# EAGLE board Qwiic PL-N823 IR Breakout-Panel (EAGLE 9.5.1)
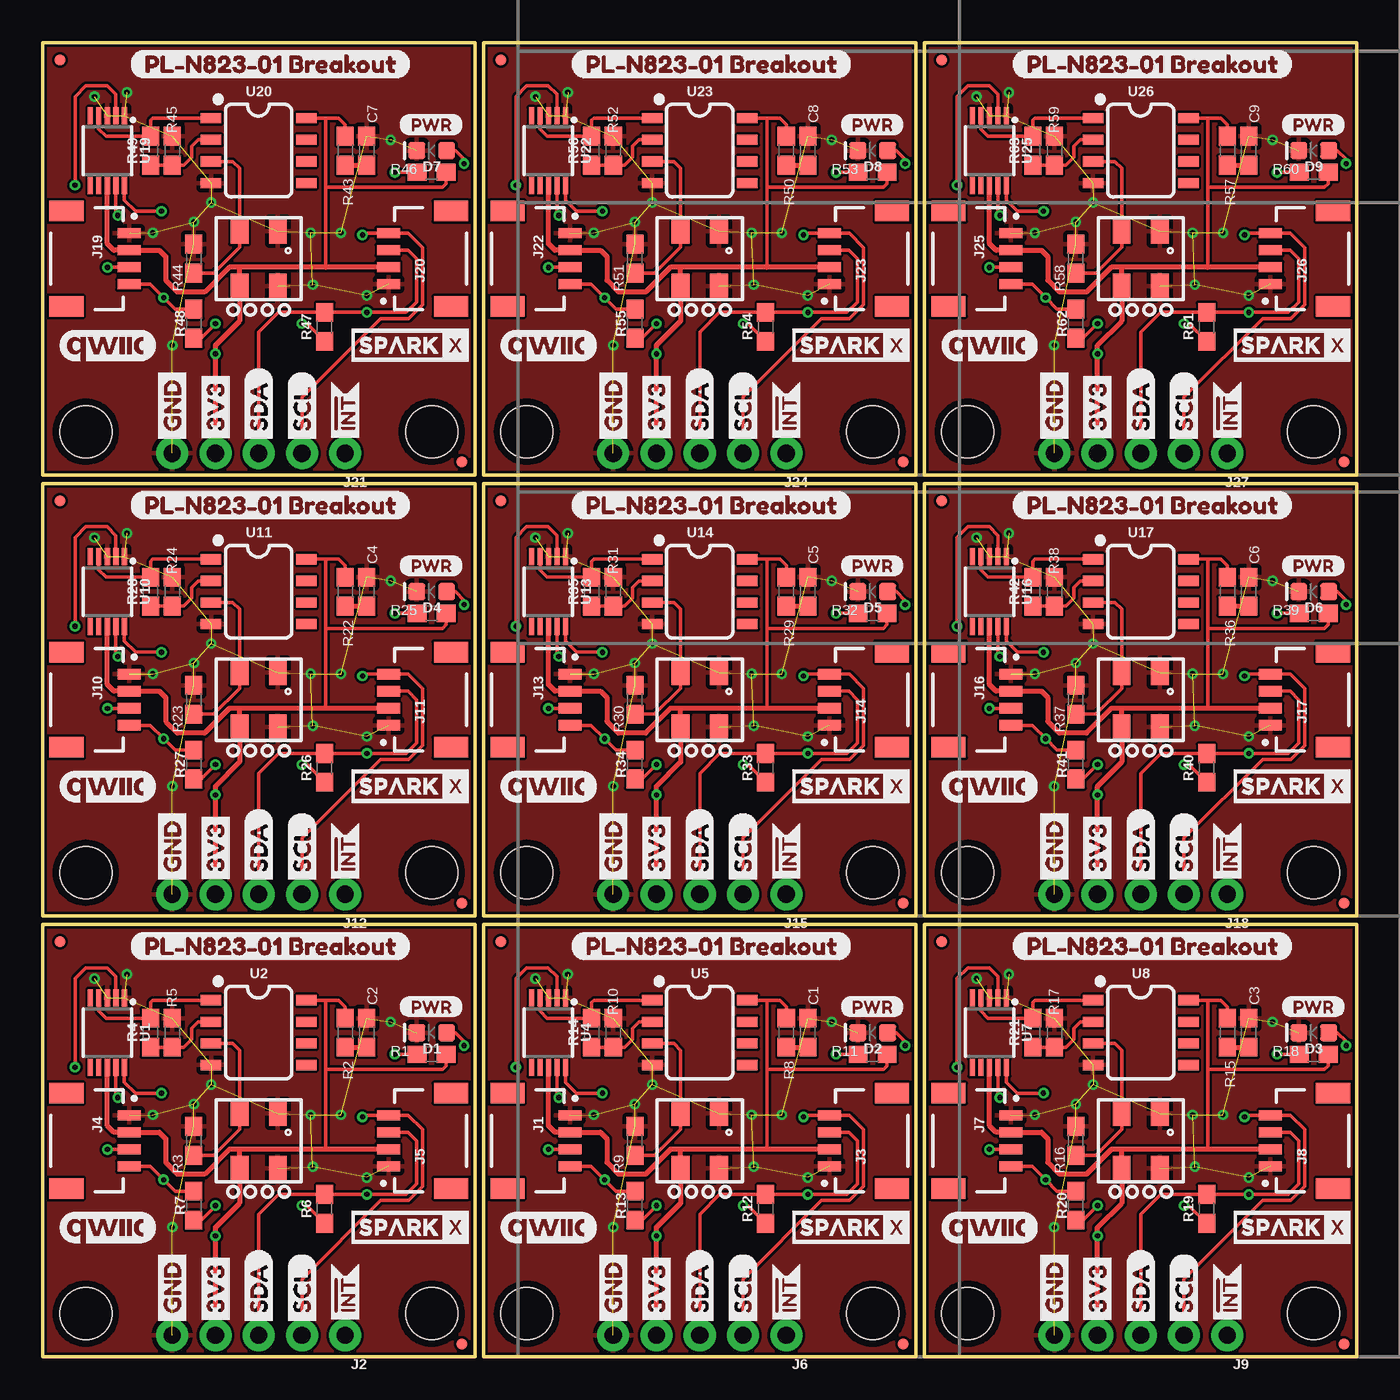
[diagram p0: board, top side]
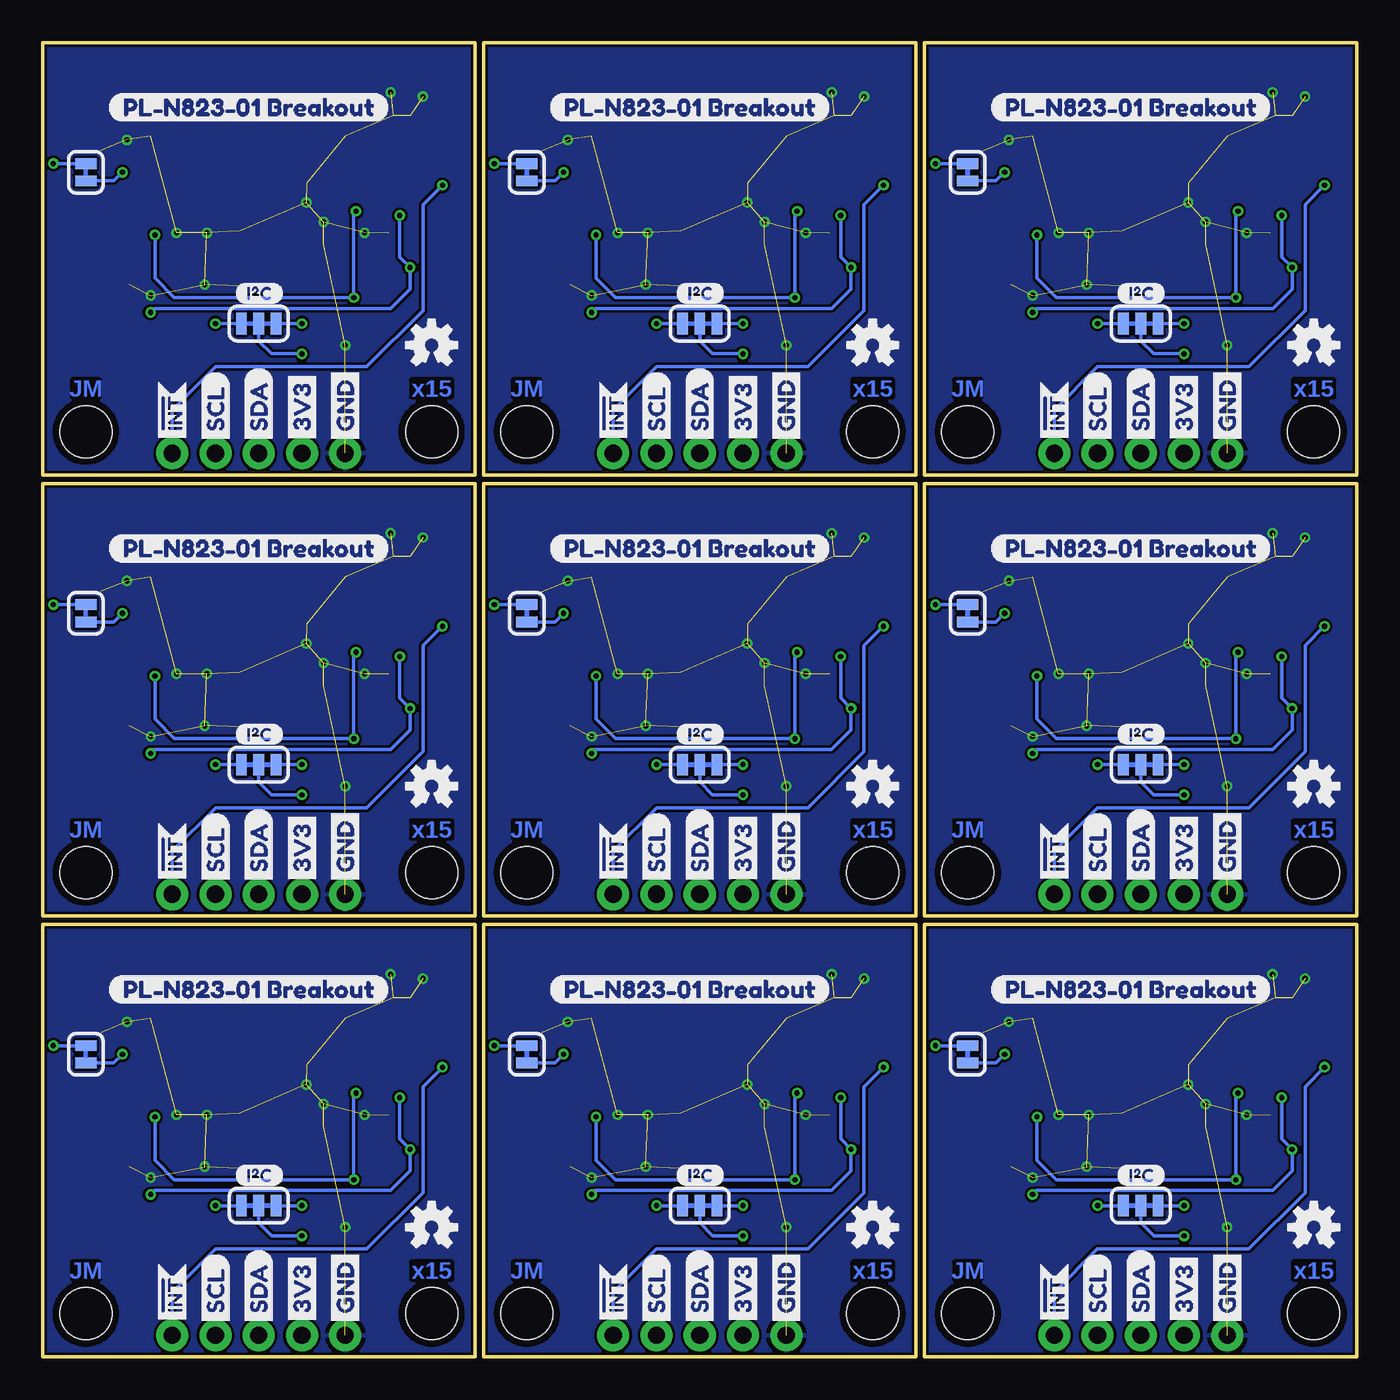
[diagram p1: board, bottom side, seen from below]

Size 77.22 x 77.22 mm. Coordinates in mm from the lower left corner, seen from the top.
Outline: 0,25.4 25.4,25.4 25.4,0 0,0 0,25.4
Outline: 25.91,25.4 51.31,25.4 51.31,0 25.91,0 25.91,25.4
Outline: 51.82,25.4 77.22,25.4 77.22,0 51.82,0 51.82,25.4
Outline: 0,51.31 25.4,51.31 25.4,25.91 0,25.91 0,51.31
Outline: 25.91,51.31 51.31,51.31 51.31,25.91 25.91,25.91 25.91,51.31
Outline: 51.82,51.31 77.22,51.31 77.22,25.91 51.82,25.91 51.82,51.31
Outline: 0,77.22 25.4,77.22 25.4,51.82 0,51.82 0,77.22
Outline: 25.91,77.22 51.31,77.22 51.31,51.82 25.91,51.82 25.91,77.22
Outline: 51.82,77.22 77.22,77.22 77.22,51.82 51.82,51.82 51.82,77.22
Copper layers (1*16): Top 0.035mm / dielectric 1.5mm / Bottom 0.035mm
Design rules "SparkFun-2-layer-PCBWay-LIMIT": minimum track width 6mil, minimum drill 0.3mm, track to track 6mil, track to pad 6mil, pad to pad 6mil, via to via 6mil, smd to smd 6mil, copper to edge 6mil, drill to drill 6mil, minimum pad ring 6mil, minimum via ring 6mil, stop-mask expansion 4mil, vias tented up to drill 25mil, thermal gap 10mil

## Footprints (pad centres in the part's own frame; a part is rotated, then mirrored left to right if it is on the bottom)
0603 = smd 1.1 x 1: 1 -0.85,0; 2 0.85,0
LED-0603 = smd 1 x 1: A -0.877,0; C 0.877,0
FIDUCIAL-MICRO = smd 0.635 x 0.635: 1 0,0
STAND-OFF-TIGHT = hole 3.048: 0,0
JST04_1MM_RA = smd 0.6 x 1.35: 1 -1.5,0; 2 -0.5,0; 3 0.5,0; 4 1.5,0 | smd 1.2 x 2: NC1 2.8,-3.675; NC2 -2.8,-3.675
1X05_NO_SILK = drill 1.016 pad 1.88: 1 0,0; 2 2.54,0; 3 5.08,0; 4 7.62,0; 5 10.16,0
SMT-JUMPER_3_2-NC_TRACE_SILK = smd 0.635 x 1.27: 1 -1.016,0; 2 0,0; 3 1.016,0
SMT-JUMPER_2_NC_TRACE_SILK = smd 0.635 x 1.27: 1 -0.508,0; 2 0.508,0
MSOP10 = smd 0.3 x 1: 1 -1,-2.05; 2 -0.5,-2.05; 3 0,-2.05; 4 0.5,-2.05; 5 1,-2.05; 6 1,2.05; 7 0.5,2.05; 8 0,2.05; 9 -0.5,2.05; 10 -1,2.05
SO08 = smd 0.6 x 1.2: 1 -1.905,-2.8; 2 -0.635,-2.8; 3 0.635,-2.8; 4 1.905,-2.8; 5 1.905,2.8; 6 0.635,2.8; 7 -0.635,2.8; 8 -1.905,2.8
PL-N823-01 = smd 1.05 x 1.475: DRAIN -1.125,-1.613; GND@1 1.125,1.613; GND@2 1.125,-1.613; SOURCE -1.125,1.613

## Placement (x,y rotation side)
C1  0.1uF  [0603]  44.96,19.05 90 top
C2  0.1uF  [0603]  19.05,19.05 90 top
C3  0.1uF  [0603]  70.87,19.05 90 top
C4  0.1uF  [0603]  19.05,44.96 90 top
C5  0.1uF  [0603]  44.96,44.96 90 top
C6  0.1uF  [0603]  70.87,44.96 90 top
C7  0.1uF  [0603]  19.05,70.87 90 top
C8  0.1uF  [0603]  44.96,70.87 90 top
C9  0.1uF  [0603]  70.87,70.87 90 top
D1  BLUE  [LED-0603]  22.86,19.05 180 top
D2  BLUE  [LED-0603]  48.77,19.05 180 top
D3  BLUE  [LED-0603]  74.68,19.05 180 top
D4  BLUE  [LED-0603]  22.86,44.96 180 top
D5  BLUE  [LED-0603]  48.77,44.96 180 top
D6  BLUE  [LED-0603]  74.68,44.96 180 top
D7  BLUE  [LED-0603]  22.86,70.87 180 top
D8  BLUE  [LED-0603]  48.77,70.87 180 top
D9  BLUE  [LED-0603]  74.68,70.87 180 top
FD1  FIDUCIALUFIDUCIAL  [FIDUCIAL-MICRO]  1.02,24.38 0 top
FD2  FIDUCIALUFIDUCIAL  [FIDUCIAL-MICRO]  24.64,0.76 0 top
FD3  FIDUCIALUFIDUCIAL  [FIDUCIAL-MICRO]  26.92,24.38 0 top
FD4  FIDUCIALUFIDUCIAL  [FIDUCIAL-MICRO]  50.55,0.76 0 top
FD5  FIDUCIALUFIDUCIAL  [FIDUCIAL-MICRO]  52.83,24.38 0 top
FD6  FIDUCIALUFIDUCIAL  [FIDUCIAL-MICRO]  76.45,0.76 0 top
FD7  FIDUCIALUFIDUCIAL  [FIDUCIAL-MICRO]  1.02,50.29 0 top
FD8  FIDUCIALUFIDUCIAL  [FIDUCIAL-MICRO]  24.64,26.67 0 top
FD9  FIDUCIALUFIDUCIAL  [FIDUCIAL-MICRO]  26.92,50.29 0 top
FD10  FIDUCIALUFIDUCIAL  [FIDUCIAL-MICRO]  50.55,26.67 0 top
FD11  FIDUCIALUFIDUCIAL  [FIDUCIAL-MICRO]  52.83,50.29 0 top
FD12  FIDUCIALUFIDUCIAL  [FIDUCIAL-MICRO]  76.45,26.67 0 top
FD13  FIDUCIALUFIDUCIAL  [FIDUCIAL-MICRO]  1.02,76.2 0 top
FD14  FIDUCIALUFIDUCIAL  [FIDUCIAL-MICRO]  24.64,52.58 0 top
FD15  FIDUCIALUFIDUCIAL  [FIDUCIAL-MICRO]  26.92,76.2 0 top
FD16  FIDUCIALUFIDUCIAL  [FIDUCIAL-MICRO]  50.55,52.58 0 top
FD17  FIDUCIALUFIDUCIAL  [FIDUCIAL-MICRO]  52.83,76.2 0 top
FD18  FIDUCIALUFIDUCIAL  [FIDUCIAL-MICRO]  76.45,52.58 0 top
FRAME1  FRAME-LETTERNO_PACKAGE  [DUMMY]  0,0 0 top
FRAME2  FRAME-LETTERNO_PACKAGE  [DUMMY]  25.91,0 0 top
FRAME3  FRAME-LETTERNO_PACKAGE  [DUMMY]  51.82,0 0 top
FRAME4  FRAME-LETTERNO_PACKAGE  [DUMMY]  0,25.91 0 top
FRAME5  FRAME-LETTERNO_PACKAGE  [DUMMY]  25.91,25.91 0 top
FRAME6  FRAME-LETTERNO_PACKAGE  [DUMMY]  51.82,25.91 0 top
FRAME7  FRAME-LETTERNO_PACKAGE  [DUMMY]  0,51.82 0 top
FRAME8  FRAME-LETTERNO_PACKAGE  [DUMMY]  25.91,51.82 0 top
FRAME9  FRAME-LETTERNO_PACKAGE  [DUMMY]  51.82,51.82 0 top
H1  STAND-OFFTIGHT  [STAND-OFF-TIGHT]  2.54,2.54 0 top
H2  STAND-OFFTIGHT  [STAND-OFF-TIGHT]  22.86,2.54 0 top
H3  STAND-OFFTIGHT  [STAND-OFF-TIGHT]  28.45,2.54 0 top
H4  STAND-OFFTIGHT  [STAND-OFF-TIGHT]  48.77,2.54 0 top
H5  STAND-OFFTIGHT  [STAND-OFF-TIGHT]  54.36,2.54 0 top
H6  STAND-OFFTIGHT  [STAND-OFF-TIGHT]  74.68,2.54 0 top
H7  STAND-OFFTIGHT  [STAND-OFF-TIGHT]  2.54,28.45 0 top
H8  STAND-OFFTIGHT  [STAND-OFF-TIGHT]  22.86,28.45 0 top
H9  STAND-OFFTIGHT  [STAND-OFF-TIGHT]  28.45,28.45 0 top
H10  STAND-OFFTIGHT  [STAND-OFF-TIGHT]  48.77,28.45 0 top
H11  STAND-OFFTIGHT  [STAND-OFF-TIGHT]  54.36,28.45 0 top
H12  STAND-OFFTIGHT  [STAND-OFF-TIGHT]  74.68,28.45 0 top
H13  STAND-OFFTIGHT  [STAND-OFF-TIGHT]  2.54,54.36 0 top
H14  STAND-OFFTIGHT  [STAND-OFF-TIGHT]  22.86,54.36 0 top
H15  STAND-OFFTIGHT  [STAND-OFF-TIGHT]  28.45,54.36 0 top
H16  STAND-OFFTIGHT  [STAND-OFF-TIGHT]  48.77,54.36 0 top
H17  STAND-OFFTIGHT  [STAND-OFF-TIGHT]  54.36,54.36 0 top
H18  STAND-OFFTIGHT  [STAND-OFF-TIGHT]  74.68,54.36 0 top
J1  [JST04_1MM_RA]  30.99,12.7 270 top
J2  [1X05_NO_SILK]  17.78,1.27 180 top
J3  [JST04_1MM_RA]  46.23,12.7 90 top
J4  [JST04_1MM_RA]  5.08,12.7 270 top
J5  [JST04_1MM_RA]  20.32,12.7 90 top
J6  [1X05_NO_SILK]  43.69,1.27 180 top
J7  [JST04_1MM_RA]  56.9,12.7 270 top
J8  [JST04_1MM_RA]  72.14,12.7 90 top
J9  [1X05_NO_SILK]  69.6,1.27 180 top
J10  [JST04_1MM_RA]  5.08,38.61 270 top
J11  [JST04_1MM_RA]  20.32,38.61 90 top
J12  [1X05_NO_SILK]  17.78,27.18 180 top
J13  [JST04_1MM_RA]  30.99,38.61 270 top
J14  [JST04_1MM_RA]  46.23,38.61 90 top
J15  [1X05_NO_SILK]  43.69,27.18 180 top
J16  [JST04_1MM_RA]  56.9,38.61 270 top
J17  [JST04_1MM_RA]  72.14,38.61 90 top
J18  [1X05_NO_SILK]  69.6,27.18 180 top
J19  [JST04_1MM_RA]  5.08,64.52 270 top
J20  [JST04_1MM_RA]  20.32,64.52 90 top
J21  [1X05_NO_SILK]  17.78,53.09 180 top
J22  [JST04_1MM_RA]  30.99,64.52 270 top
J23  [JST04_1MM_RA]  46.23,64.52 90 top
J24  [1X05_NO_SILK]  43.69,53.09 180 top
J25  [JST04_1MM_RA]  56.9,64.52 270 top
J26  [JST04_1MM_RA]  72.14,64.52 90 top
J27  [1X05_NO_SILK]  69.6,53.09 180 top
JP1  JUMPER-SMT_3_2-NC_TRACE_SILK  [SMT-JUMPER_3_2-NC_TRACE_SILK]  12.7,8.89 0 bottom
JP2  JUMPER-SMT_2_NC_TRACE_SILK  [SMT-JUMPER_2_NC_TRACE_SILK]  22.86,17.78 90 bottom
JP3  JUMPER-SMT_3_2-NC_TRACE_SILK  [SMT-JUMPER_3_2-NC_TRACE_SILK]  38.61,8.89 0 bottom
JP4  JUMPER-SMT_2_NC_TRACE_SILK  [SMT-JUMPER_2_NC_TRACE_SILK]  48.77,17.78 90 bottom
JP5  JUMPER-SMT_3_2-NC_TRACE_SILK  [SMT-JUMPER_3_2-NC_TRACE_SILK]  64.52,8.89 0 bottom
JP6  JUMPER-SMT_2_NC_TRACE_SILK  [SMT-JUMPER_2_NC_TRACE_SILK]  74.68,17.78 90 bottom
JP7  JUMPER-SMT_3_2-NC_TRACE_SILK  [SMT-JUMPER_3_2-NC_TRACE_SILK]  12.7,34.8 0 bottom
JP8  JUMPER-SMT_2_NC_TRACE_SILK  [SMT-JUMPER_2_NC_TRACE_SILK]  22.86,43.69 90 bottom
JP9  JUMPER-SMT_3_2-NC_TRACE_SILK  [SMT-JUMPER_3_2-NC_TRACE_SILK]  38.61,34.8 0 bottom
JP10  JUMPER-SMT_2_NC_TRACE_SILK  [SMT-JUMPER_2_NC_TRACE_SILK]  48.77,43.69 90 bottom
JP11  JUMPER-SMT_3_2-NC_TRACE_SILK  [SMT-JUMPER_3_2-NC_TRACE_SILK]  64.52,34.8 0 bottom
JP12  JUMPER-SMT_2_NC_TRACE_SILK  [SMT-JUMPER_2_NC_TRACE_SILK]  74.68,43.69 90 bottom
JP13  JUMPER-SMT_3_2-NC_TRACE_SILK  [SMT-JUMPER_3_2-NC_TRACE_SILK]  12.7,60.71 0 bottom
JP14  JUMPER-SMT_2_NC_TRACE_SILK  [SMT-JUMPER_2_NC_TRACE_SILK]  22.86,69.6 90 bottom
JP15  JUMPER-SMT_3_2-NC_TRACE_SILK  [SMT-JUMPER_3_2-NC_TRACE_SILK]  38.61,60.71 0 bottom
JP16  JUMPER-SMT_2_NC_TRACE_SILK  [SMT-JUMPER_2_NC_TRACE_SILK]  48.77,69.6 90 bottom
JP17  JUMPER-SMT_3_2-NC_TRACE_SILK  [SMT-JUMPER_3_2-NC_TRACE_SILK]  64.52,60.71 0 bottom
JP18  JUMPER-SMT_2_NC_TRACE_SILK  [SMT-JUMPER_2_NC_TRACE_SILK]  74.68,69.6 90 bottom
R1  27  [0603]  22.86,17.78 0 top
R2  10k  [0603]  17.78,19.05 270 top
R3  47k  [0603]  8.89,12.7 90 top
R4  1.20k  [0603]  6.35,19.05 90 top
R5  1k  [0603]  7.62,19.05 270 top
R6  2.2k  [0603]  16.57,8.7 90 top
R7  2.2k  [0603]  8.89,8.89 90 top
R8  10k  [0603]  43.69,19.05 270 top
R9  47k  [0603]  34.8,12.7 90 top
R10  1k  [0603]  33.53,19.05 270 top
R11  27  [0603]  48.77,17.78 0 top
R12  2.2k  [0603]  42.48,8.7 90 top
R13  2.2k  [0603]  34.8,8.89 90 top
R14  1.20k  [0603]  32.26,19.05 90 top
R15  10k  [0603]  69.6,19.05 270 top
R16  47k  [0603]  60.71,12.7 90 top
R17  1k  [0603]  59.44,19.05 270 top
R18  27  [0603]  74.68,17.78 0 top
R19  2.2k  [0603]  68.39,8.7 90 top
R20  2.2k  [0603]  60.71,8.89 90 top
R21  1.20k  [0603]  58.17,19.05 90 top
R22  10k  [0603]  17.78,44.96 270 top
R23  47k  [0603]  8.89,38.61 90 top
R24  1k  [0603]  7.62,44.96 270 top
R25  27  [0603]  22.86,43.69 0 top
R26  2.2k  [0603]  16.57,34.61 90 top
R27  2.2k  [0603]  8.89,34.8 90 top
R28  1.20k  [0603]  6.35,44.96 90 top
R29  10k  [0603]  43.69,44.96 270 top
R30  47k  [0603]  34.8,38.61 90 top
R31  1k  [0603]  33.53,44.96 270 top
R32  27  [0603]  48.77,43.69 0 top
R33  2.2k  [0603]  42.48,34.61 90 top
R34  2.2k  [0603]  34.8,34.8 90 top
R35  1.20k  [0603]  32.26,44.96 90 top
R36  10k  [0603]  69.6,44.96 270 top
R37  47k  [0603]  60.71,38.61 90 top
R38  1k  [0603]  59.44,44.96 270 top
R39  27  [0603]  74.68,43.69 0 top
R40  2.2k  [0603]  68.39,34.61 90 top
R41  2.2k  [0603]  60.71,34.8 90 top
R42  1.20k  [0603]  58.17,44.96 90 top
R43  10k  [0603]  17.78,70.87 270 top
R44  47k  [0603]  8.89,64.52 90 top
R45  1k  [0603]  7.62,70.87 270 top
R46  27  [0603]  22.86,69.6 0 top
R47  2.2k  [0603]  16.57,60.52 90 top
R48  2.2k  [0603]  8.89,60.71 90 top
R49  1.20k  [0603]  6.35,70.87 90 top
R50  10k  [0603]  43.69,70.87 270 top
R51  47k  [0603]  34.8,64.52 90 top
R52  1k  [0603]  33.53,70.87 270 top
R53  27  [0603]  48.77,69.6 0 top
R54  2.2k  [0603]  42.48,60.52 90 top
R55  2.2k  [0603]  34.8,60.71 90 top
R56  1.20k  [0603]  32.26,70.87 90 top
R57  10k  [0603]  69.6,70.87 270 top
R58  47k  [0603]  60.71,64.52 90 top
R59  1k  [0603]  59.44,70.87 270 top
R60  27  [0603]  74.68,69.6 0 top
R61  2.2k  [0603]  68.39,60.52 90 top
R62  2.2k  [0603]  60.71,60.71 90 top
R63  1.20k  [0603]  58.17,70.87 90 top
U1  ADS1015  [MSOP10]  3.81,19.05 180 top
U2  LMV358  [SO08]  12.7,19.05 270 top
U3  PL-N823-01  [PL-N823-01]  12.7,12.7 0 top
U4  ADS1015  [MSOP10]  29.72,19.05 180 top
U5  LMV358  [SO08]  38.61,19.05 270 top
U6  PL-N823-01  [PL-N823-01]  38.61,12.7 0 top
U7  ADS1015  [MSOP10]  55.63,19.05 180 top
U8  LMV358  [SO08]  64.52,19.05 270 top
U9  PL-N823-01  [PL-N823-01]  64.52,12.7 0 top
U10  ADS1015  [MSOP10]  3.81,44.96 180 top
U11  LMV358  [SO08]  12.7,44.96 270 top
U12  PL-N823-01  [PL-N823-01]  12.7,38.61 0 top
U13  ADS1015  [MSOP10]  29.72,44.96 180 top
U14  LMV358  [SO08]  38.61,44.96 270 top
U15  PL-N823-01  [PL-N823-01]  38.61,38.61 0 top
U16  ADS1015  [MSOP10]  55.63,44.96 180 top
U17  LMV358  [SO08]  64.52,44.96 270 top
U18  PL-N823-01  [PL-N823-01]  64.52,38.61 0 top
U19  ADS1015  [MSOP10]  3.81,70.87 180 top
U20  LMV358  [SO08]  12.7,70.87 270 top
U21  PL-N823-01  [PL-N823-01]  12.7,64.52 0 top
U22  ADS1015  [MSOP10]  29.72,70.87 180 top
U23  LMV358  [SO08]  38.61,70.87 270 top
U24  PL-N823-01  [PL-N823-01]  38.61,64.52 0 top
U25  ADS1015  [MSOP10]  55.63,70.87 180 top
U26  LMV358  [SO08]  64.52,70.87 270 top
U27  PL-N823-01  [PL-N823-01]  64.52,64.52 0 top
U$1  [QWIIC_COPYRIGHT_SMALL]  3.81,7.62 0 top
U$2  [SDA-[)]  12.7,1.65 90 top
U$3  [PRODUCTION_INSTRUCTIONS]  27.94,50.8 0 top
U$4  [PL#N823#01_BREAKOUT0]  21.59,21.59 0 bottom
U$5  [I_SUPER2_C-()-03]  14.1,10.67 0 bottom
U$6  [INT#-[<-04]  17.78,1.52 90 top
U$7  [OSHW-LOGO-S]  2.54,7.62 0 bottom
U$8  [PL#N823#01_BREAKOUT0]  5.08,24.13 0 top
U$9  [PWR-()-03]  20.95,20.57 0 top
U$10  [SPARKX-SMALL]  21.59,7.62 0 top
U$11  [INT#-[<-04]  17.78,1.52 90 bottom
U$12  [SCL-[)]  15.24,1.65 90 top
U$13  [SDA-[)]  12.7,1.65 90 bottom
U$14  [SCL-[)]  15.24,1.65 90 bottom
U$15  [3V3-04]  10.16,1.65 90 top
U$16  [3V3-04]  10.16,1.65 90 bottom
U$17  [GND-04]  7.62,1.65 90 top
U$18  [GND-04]  7.62,1.65 90 bottom
U$19  [OSHW-LOGO-S]  28.45,7.62 0 bottom
U$20  [PL#N823#01_BREAKOUT0]  30.99,24.13 0 top
U$21  [SPARKX-SMALL]  47.5,7.62 0 top
U$22  [QWIIC_COPYRIGHT_SMALL]  29.72,7.62 0 top
U$23  [PWR-()-03]  46.86,20.57 0 top
U$24  [SDA-[)]  38.61,1.65 90 top
U$25  [SCL-[)]  41.15,1.65 90 top
U$26  [SDA-[)]  38.61,1.65 90 bottom
U$27  [SCL-[)]  41.15,1.65 90 bottom
U$28  [3V3-04]  36.07,1.65 90 top
U$29  [3V3-04]  36.07,1.65 90 bottom
U$30  [GND-04]  33.53,1.65 90 top
U$31  [GND-04]  33.53,1.65 90 bottom
U$32  [PL#N823#01_BREAKOUT0]  47.5,21.59 0 bottom
U$33  [I_SUPER2_C-()-03]  40.01,10.67 0 bottom
U$34  [INT#-[<-04]  43.69,1.52 90 top
U$35  [INT#-[<-04]  43.69,1.52 90 bottom
U$36  [PRODUCTION_INSTRUCTIONS]  53.85,50.8 0 top
U$37  [OSHW-LOGO-S]  54.36,7.62 0 bottom
U$38  [PL#N823#01_BREAKOUT0]  56.9,24.13 0 top
U$39  [SPARKX-SMALL]  73.41,7.62 0 top
U$40  [QWIIC_COPYRIGHT_SMALL]  55.63,7.62 0 top
U$41  [PWR-()-03]  72.77,20.57 0 top
U$42  [SDA-[)]  64.52,1.65 90 top
U$43  [SCL-[)]  67.06,1.65 90 top
U$44  [SDA-[)]  64.52,1.65 90 bottom
U$45  [SCL-[)]  67.06,1.65 90 bottom
U$46  [3V3-04]  61.98,1.65 90 top
U$47  [3V3-04]  61.98,1.65 90 bottom
U$48  [GND-04]  59.44,1.65 90 top
U$49  [GND-04]  59.44,1.65 90 bottom
U$50  [PL#N823#01_BREAKOUT0]  73.41,21.59 0 bottom
U$51  [I_SUPER2_C-()-03]  65.91,10.67 0 bottom
U$52  [INT#-[<-04]  69.6,1.52 90 top
U$53  [INT#-[<-04]  69.6,1.52 90 bottom
U$54  [PRODUCTION_INSTRUCTIONS]  79.76,50.8 0 top
U$55  [OSHW-LOGO-S]  2.54,33.53 0 bottom
U$56  [PL#N823#01_BREAKOUT0]  5.08,50.04 0 top
U$57  [SPARKX-SMALL]  21.59,33.53 0 top
U$58  [QWIIC_COPYRIGHT_SMALL]  3.81,33.53 0 top
U$59  [PWR-()-03]  20.95,46.48 0 top
U$60  [SDA-[)]  12.7,27.56 90 top
U$61  [SCL-[)]  15.24,27.56 90 top
U$62  [SDA-[)]  12.7,27.56 90 bottom
U$63  [SCL-[)]  15.24,27.56 90 bottom
U$64  [3V3-04]  10.16,27.56 90 top
U$65  [3V3-04]  10.16,27.56 90 bottom
U$66  [GND-04]  7.62,27.56 90 top
U$67  [GND-04]  7.62,27.56 90 bottom
U$68  [PL#N823#01_BREAKOUT0]  21.59,47.5 0 bottom
U$69  [I_SUPER2_C-()-03]  14.1,36.58 0 bottom
U$70  [INT#-[<-04]  17.78,27.43 90 top
U$71  [INT#-[<-04]  17.78,27.43 90 bottom
U$72  [PRODUCTION_INSTRUCTIONS]  27.94,76.71 0 top
U$73  [OSHW-LOGO-S]  28.45,33.53 0 bottom
U$74  [PL#N823#01_BREAKOUT0]  30.99,50.04 0 top
U$75  [SPARKX-SMALL]  47.5,33.53 0 top
U$76  [QWIIC_COPYRIGHT_SMALL]  29.72,33.53 0 top
U$77  [PWR-()-03]  46.86,46.48 0 top
U$78  [SDA-[)]  38.61,27.56 90 top
U$79  [SCL-[)]  41.15,27.56 90 top
U$80  [SDA-[)]  38.61,27.56 90 bottom
U$81  [SCL-[)]  41.15,27.56 90 bottom
U$82  [3V3-04]  36.07,27.56 90 top
U$83  [3V3-04]  36.07,27.56 90 bottom
U$84  [GND-04]  33.53,27.56 90 top
U$85  [GND-04]  33.53,27.56 90 bottom
U$86  [PL#N823#01_BREAKOUT0]  47.5,47.5 0 bottom
U$87  [I_SUPER2_C-()-03]  40.01,36.58 0 bottom
U$88  [INT#-[<-04]  43.69,27.43 90 top
U$89  [INT#-[<-04]  43.69,27.43 90 bottom
U$90  [PRODUCTION_INSTRUCTIONS]  53.85,76.71 0 top
U$91  [OSHW-LOGO-S]  54.36,33.53 0 bottom
U$92  [PL#N823#01_BREAKOUT0]  56.9,50.04 0 top
U$93  [SPARKX-SMALL]  73.41,33.53 0 top
U$94  [QWIIC_COPYRIGHT_SMALL]  55.63,33.53 0 top
U$95  [PWR-()-03]  72.77,46.48 0 top
U$96  [SDA-[)]  64.52,27.56 90 top
U$97  [SCL-[)]  67.06,27.56 90 top
U$98  [SDA-[)]  64.52,27.56 90 bottom
U$99  [SCL-[)]  67.06,27.56 90 bottom
U$100  [3V3-04]  61.98,27.56 90 top
U$101  [3V3-04]  61.98,27.56 90 bottom
U$102  [GND-04]  59.44,27.56 90 top
U$103  [GND-04]  59.44,27.56 90 bottom
U$104  [PL#N823#01_BREAKOUT0]  73.41,47.5 0 bottom
U$105  [I_SUPER2_C-()-03]  65.91,36.58 0 bottom
U$106  [INT#-[<-04]  69.6,27.43 90 top
U$107  [INT#-[<-04]  69.6,27.43 90 bottom
U$108  [PRODUCTION_INSTRUCTIONS]  79.76,76.71 0 top
U$109  [OSHW-LOGO-S]  2.54,59.44 0 bottom
U$110  [PL#N823#01_BREAKOUT0]  5.08,75.95 0 top
U$111  [SPARKX-SMALL]  21.59,59.44 0 top
U$112  [QWIIC_COPYRIGHT_SMALL]  3.81,59.44 0 top
U$113  [PWR-()-03]  20.95,72.39 0 top
U$114  [SDA-[)]  12.7,53.47 90 top
U$115  [SCL-[)]  15.24,53.47 90 top
U$116  [SDA-[)]  12.7,53.47 90 bottom
U$117  [SCL-[)]  15.24,53.47 90 bottom
U$118  [3V3-04]  10.16,53.47 90 top
U$119  [3V3-04]  10.16,53.47 90 bottom
U$120  [GND-04]  7.62,53.47 90 top
U$121  [GND-04]  7.62,53.47 90 bottom
U$122  [PL#N823#01_BREAKOUT0]  21.59,73.41 0 bottom
U$123  [I_SUPER2_C-()-03]  14.1,62.48 0 bottom
U$124  [INT#-[<-04]  17.78,53.34 90 top
U$125  [INT#-[<-04]  17.78,53.34 90 bottom
U$126  [PRODUCTION_INSTRUCTIONS]  27.94,102.62 0 top  (outside the outline)
U$127  [OSHW-LOGO-S]  28.45,59.44 0 bottom
U$128  [PL#N823#01_BREAKOUT0]  30.99,75.95 0 top
U$129  [SPARKX-SMALL]  47.5,59.44 0 top
U$130  [QWIIC_COPYRIGHT_SMALL]  29.72,59.44 0 top
U$131  [PWR-()-03]  46.86,72.39 0 top
U$132  [SDA-[)]  38.61,53.47 90 top
U$133  [SCL-[)]  41.15,53.47 90 top
U$134  [SDA-[)]  38.61,53.47 90 bottom
U$135  [SCL-[)]  41.15,53.47 90 bottom
U$136  [3V3-04]  36.07,53.47 90 top
U$137  [3V3-04]  36.07,53.47 90 bottom
U$138  [GND-04]  33.53,53.47 90 top
U$139  [GND-04]  33.53,53.47 90 bottom
U$140  [PL#N823#01_BREAKOUT0]  47.5,73.41 0 bottom
U$141  [I_SUPER2_C-()-03]  40.01,62.48 0 bottom
U$142  [INT#-[<-04]  43.69,53.34 90 top
U$143  [INT#-[<-04]  43.69,53.34 90 bottom
U$144  [PRODUCTION_INSTRUCTIONS]  53.85,102.62 0 top  (outside the outline)
U$145  [OSHW-LOGO-S]  54.36,59.44 0 bottom
U$146  [PL#N823#01_BREAKOUT0]  56.9,75.95 0 top
U$147  [SPARKX-SMALL]  73.41,59.44 0 top
U$148  [QWIIC_COPYRIGHT_SMALL]  55.63,59.44 0 top
U$149  [PWR-()-03]  72.77,72.39 0 top
U$150  [SDA-[)]  64.52,53.47 90 top
U$151  [SCL-[)]  67.06,53.47 90 top
U$152  [SDA-[)]  64.52,53.47 90 bottom
U$153  [SCL-[)]  67.06,53.47 90 bottom
U$154  [3V3-04]  61.98,53.47 90 top
U$155  [3V3-04]  61.98,53.47 90 bottom
U$156  [GND-04]  59.44,53.47 90 top
U$157  [GND-04]  59.44,53.47 90 bottom
U$158  [PL#N823#01_BREAKOUT0]  73.41,73.41 0 bottom
U$159  [I_SUPER2_C-()-03]  65.91,62.48 0 bottom
U$160  [INT#-[<-04]  69.6,53.34 90 top
U$161  [INT#-[<-04]  69.6,53.34 90 bottom
U$162  [PRODUCTION_INSTRUCTIONS]  79.76,102.62 0 top  (outside the outline)

## Library data of the parts
C1-C9 = SparkFun-Capacitors; PROD_ID: CAP-00810
D1-D9 = SparkFun-LED; PROD_ID: DIO-08575
FD1-FD18 U$3 U$7 U$19 U$36 U$37 U$54 U$55 U$72 U$73 U$90 U$91 U$108 U$109 U$126 U$127 U$144 U$145 U$162 = SparkFun-Aesthetics
FRAME1-FRAME9 = SparkFun-Aesthetics; DESIGNER: Nobody; VERSION: v01
H1-H18 = SparkFun-Hardware
J1 J3-J5 J7 J8 J10 J11 J13 J14 J16 J17 J19 J20 J22 J23 J25 J26 = SparkFun-Connectors; PROD_ID: CONN-13694
J2 J6 J9 J12 J15 J18 J21 J24 J27 = SparkFun-Connectors
JP1-JP18 = SparkFun-Jumpers
R1 R11 R18 R25 R32 R39 R46 R53 R60 = SparkFun-Resistors; PROD_ID: RES-09334
R2 R8 R15 R22 R29 R36 R43 R50 R57 = SparkFun-Resistors; PROD_ID: RES-00824
R3 R9 R16 R23 R30 R37 R44 R51 R58 = SparkFun-Resistors; PROD_ID: RES-07871
R4 R14 R21 R28 R35 R42 R49 R56 R63 = SparkFun-Resistors; PROD_ID: RES-08413
R5 R10 R17 R24 R31 R38 R45 R52 R59 = SparkFun-Resistors; PROD_ID: RES-07856
R6 R7 R12 R13 R19 R20 R26 R27 R33 R34 R40 R41 R47 R48 R54 R55 R61 R62 = SparkFun-Resistors; PROD_ID: RES-08272
U1 U4 U7 U10 U13 U16 U19 U22 U25 = SparkFun-IC-Conversion; PROD_ID: IC-12270
U2 U5 U8 U11 U14 U17 U20 U23 U26 = SparkFun-IC-Amplifiers; PROD_ID: IC-09657
U3 U6 U9 U12 U15 U18 U21 U24 U27 = PL-N823-01
U$1 U$2 U$5 U$6 U$9 U$11-U$18 U$22-U$31 U$33-U$35 U$40-U$49 U$51-U$53 U$58-U$67 U$69-U$71 U$76-U$85 U$87-U$89 U$94-U$103 U$105-U$107 U$112-U$121 U$123-U$125 U$130-U$139 U$141-U$143 U$148-U$157 U$159-U$161 = Labels
U$4 U$8 U$20 U$32 U$38 U$50 U$56 U$68 U$74 U$86 U$92 U$104 U$110 U$122 U$128 U$140 U$146 U$158 = buzzard_labels_pln82301
U$10 U$21 U$39 U$57 U$75 U$93 U$111 U$129 U$147 = SparkX

## Nets
3.3V: J2.4 J4.2 J5.2 JP1.2 R1.2 R2.1 U1.8 U2.8 U3.DRAIN
3.3V1: J1.2 J3.2 J6.4 JP3.2 R8.1 R11.2 U4.8 U5.8 U6.DRAIN
3.3V2: J7.2 J8.2 J9.4 JP5.2 R15.1 R18.2 U7.8 U8.8 U9.DRAIN
3.3V3: J10.2 J11.2 J12.4 JP7.2 R22.1 R25.2 U10.8 U11.8 U12.DRAIN
3.3V4: J13.2 J14.2 J15.4 JP9.2 R29.1 R32.2 U13.8 U14.8 U15.DRAIN
3.3V5: J16.2 J17.2 J18.4 JP11.2 R36.1 R39.2 U16.8 U17.8 U18.DRAIN
3.3V6: J19.2 J20.2 J21.4 JP13.2 R43.1 R46.2 U19.8 U20.8 U21.DRAIN
3.3V7: J22.2 J23.2 J24.4 JP15.2 R50.1 R53.2 U22.8 U23.8 U24.DRAIN
3.3V8: J25.2 J26.2 J27.4 JP17.2 R57.1 R60.2 U25.8 U26.8 U27.DRAIN
!INT: J2.1 U1.2
!INT1: J6.1 U4.2
!INT2: J9.1 U7.2
!INT3: J12.1 U10.2
!INT4: J15.1 U13.2
!INT5: J18.1 U16.2
!INT6: J21.1 U19.2
!INT7: J24.1 U22.2
!INT8: J27.1 U25.2
GND: C2.2 D1.C J2.5 J4.1 J5.1 R3.2 R5.1 U1.1 U1.3 U2.4 U3.GND@1 U3.GND@2
GND1: C1.2 D2.C J1.1 J3.1 J6.5 R9.2 R10.1 U4.1 U4.3 U5.4 U6.GND@1 U6.GND@2
GND2: C3.2 D3.C J7.1 J8.1 J9.5 R16.2 R17.1 U7.1 U7.3 U8.4 U9.GND@1 U9.GND@2
GND3: C4.2 D4.C J10.1 J11.1 J12.5 R23.2 R24.1 U10.1 U10.3 U11.4 U12.GND@1 U12.GND@2
GND4: C5.2 D5.C J13.1 J14.1 J15.5 R30.2 R31.1 U13.1 U13.3 U14.4 U15.GND@1 U15.GND@2
GND5: C6.2 D6.C J16.1 J17.1 J18.5 R37.2 R38.1 U16.1 U16.3 U17.4 U18.GND@1 U18.GND@2
GND6: C7.2 D7.C J19.1 J20.1 J21.5 R44.2 R45.1 U19.1 U19.3 U20.4 U21.GND@1 U21.GND@2
GND7: C8.2 D8.C J22.1 J23.1 J24.5 R51.2 R52.1 U22.1 U22.3 U23.4 U24.GND@1 U24.GND@2
GND8: C9.2 D9.C J25.1 J26.1 J27.5 R58.2 R59.1 U25.1 U25.3 U26.4 U27.GND@1 U27.GND@2
N$1: R4.1 R5.2 U2.2
N$2: C2.1 R2.2
N$3: JP2.1 R1.1
N$4: JP1.3 R7.1
N$5: JP1.1 R6.1
N$6: D1.A JP2.2
N$7: C1.1 R8.2
N$8: R10.2 R14.1 U5.2
N$9: JP3.3 R13.1
N$10: JP3.1 R12.1
N$11: D2.A JP4.2
N$12: JP4.1 R11.1
N$13: C3.1 R15.2
N$14: R17.2 R21.1 U8.2
N$15: JP5.3 R20.1
N$16: JP5.1 R19.1
N$17: D3.A JP6.2
N$18: JP6.1 R18.1
N$19: C4.1 R22.2
N$20: R24.2 R28.1 U11.2
N$21: JP7.3 R27.1
N$22: JP7.1 R26.1
N$23: D4.A JP8.2
N$24: JP8.1 R25.1
N$25: C5.1 R29.2
N$26: R31.2 R35.1 U14.2
N$27: JP9.3 R34.1
N$28: JP9.1 R33.1
N$29: D5.A JP10.2
N$30: JP10.1 R32.1
N$31: C6.1 R36.2
N$32: R38.2 R42.1 U17.2
N$33: JP11.3 R41.1
N$34: JP11.1 R40.1
N$35: D6.A JP12.2
N$36: JP12.1 R39.1
N$37: C7.1 R43.2
N$38: R45.2 R49.1 U20.2
N$39: JP13.3 R48.1
N$40: JP13.1 R47.1
N$41: D7.A JP14.2
N$42: JP14.1 R46.1
N$43: C8.1 R50.2
N$44: R52.2 R56.1 U23.2
N$45: JP15.3 R55.1
N$46: JP15.1 R54.1
N$47: D8.A JP16.2
N$48: JP16.1 R53.1
N$49: C9.1 R57.2
N$50: R59.2 R63.1 U26.2
N$51: JP17.3 R62.1
N$52: JP17.1 R61.1
N$53: D9.A JP18.2
N$54: JP18.1 R60.1
SCL: J2.2 J4.4 J5.4 R7.2 U1.10
SCL1: J1.4 J3.4 J6.2 R13.2 U4.10
SCL2: J7.4 J8.4 J9.2 R20.2 U7.10
SCL3: J10.4 J11.4 J12.2 R27.2 U10.10
SCL4: J13.4 J14.4 J15.2 R34.2 U13.10
SCL5: J16.4 J17.4 J18.2 R41.2 U16.10
SCL6: J19.4 J20.4 J21.2 R48.2 U19.10
SCL7: J22.4 J23.4 J24.2 R55.2 U22.10
SCL8: J25.4 J26.4 J27.2 R62.2 U25.10
SDA: J2.3 J4.3 J5.3 R6.2 U1.9
SDA1: J1.3 J3.3 J6.3 R12.2 U4.9
SDA2: J7.3 J8.3 J9.3 R19.2 U7.9
SDA3: J10.3 J11.3 J12.3 R26.2 U10.9
SDA4: J13.3 J14.3 J15.3 R33.2 U13.9
SDA5: J16.3 J17.3 J18.3 R40.2 U16.9
SDA6: J19.3 J20.3 J21.3 R47.2 U19.9
SDA7: J22.3 J23.3 J24.3 R54.2 U22.9
SDA8: J25.3 J26.3 J27.3 R61.2 U25.9
SIGNAL: R4.2 U1.4 U2.1
SIGNAL1: R14.2 U4.4 U5.1
SIGNAL2: R21.2 U7.4 U8.1
SIGNAL3: R28.2 U10.4 U11.1
SIGNAL4: R35.2 U13.4 U14.1
SIGNAL5: R42.2 U16.4 U17.1
SIGNAL6: R49.2 U19.4 U20.1
SIGNAL7: R56.2 U22.4 U23.1
SIGNAL8: R63.2 U25.4 U26.1
SOURCE: R3.1 U2.3 U3.SOURCE
SOURCE1: R9.1 U5.3 U6.SOURCE
SOURCE2: R16.1 U8.3 U9.SOURCE
SOURCE3: R23.1 U11.3 U12.SOURCE
SOURCE4: R30.1 U14.3 U15.SOURCE
SOURCE5: R37.1 U17.3 U18.SOURCE
SOURCE6: R44.1 U20.3 U21.SOURCE
SOURCE7: R51.1 U23.3 U24.SOURCE
SOURCE8: R58.1 U26.3 U27.SOURCE

## Tracks (layer width: path | path; a pad name or v marks a point on that pad's centre or on a via)
3.3V  (via drill 0.3)
  Top 0.203: R1.2 23.71,17.11 23.5,16.89 16.64,16.89 | 16.64,16.89 16.64,12.2 | U2.8 16.64,20.95 | 16.64,20.95 17.4,20.95 17.78,20.57 R2.1 | 16.64,16.89 16.64,20.95
  Top 0.305: J5.2 16.64,12.2 11.56,12.2 | 11.56,12.2 10.97,12.2 9.52,10.74 7.93,10.74 7.24,11.43 7.24,12.83 6.87,13.2 J4.2 4.19,13.2 3.81,13.58 U1.8 | 11.56,12.2 11.57,12.18 U3.DRAIN 11.57,9.04 10.16,7.62 v10.16,7.11 J2.4
  Bottom 0.203: JP1.2 12.7,7.87 11.94,7.11 v10.16,7.11
3.3V1  (via drill 0.3)
  Top 0.203: R11.2 49.62,17.11 49.4,16.89 42.55,16.89 | 42.55,16.89 42.55,12.2 | U5.8 42.55,20.95 | 42.55,20.95 43.31,20.95 43.69,20.57 R8.1 | 42.55,16.89 42.55,20.95
  Top 0.305: J3.2 42.55,12.2 37.47,12.2 | 37.47,12.2 36.88,12.2 35.42,10.74 33.84,10.74 33.15,11.43 33.15,12.83 32.77,13.2 J1.2 30.1,13.2 29.72,13.58 U4.8 | 37.47,12.2 37.48,12.18 U6.DRAIN 37.48,9.04 36.07,7.62 v36.07,7.11 J6.4
  Bottom 0.203: JP3.2 38.61,7.87 37.85,7.11 v36.07,7.11
3.3V2  (via drill 0.3)
  Top 0.203: R18.2 75.53,17.11 75.31,16.89 68.45,16.89 | 68.45,16.89 68.45,12.2 | U8.8 68.45,20.95 | 68.45,20.95 69.22,20.95 69.6,20.57 R15.1 | 68.45,16.89 68.45,20.95
  Top 0.305: J8.2 68.45,12.2 63.37,12.2 | 63.37,12.2 62.79,12.2 61.33,10.74 59.74,10.74 59.05,11.43 59.05,12.83 58.68,13.2 J7.2 56.01,13.2 55.63,13.58 U7.8 | 63.37,12.2 63.39,12.18 U9.DRAIN 63.39,9.04 61.98,7.62 v61.98,7.11 J9.4
  Bottom 0.203: JP5.2 64.52,7.87 63.75,7.11 v61.98,7.11
3.3V3  (via drill 0.3)
  Top 0.203: R25.2 23.71,43.01 23.5,42.8 16.64,42.8 | 16.64,42.8 16.64,38.11 | U11.8 16.64,46.86 | 16.64,46.86 17.4,46.86 17.78,46.48 R22.1 | 16.64,42.8 16.64,46.86
  Top 0.305: J11.2 16.64,38.11 11.56,38.11 | 11.56,38.11 10.97,38.11 9.52,36.65 7.93,36.65 7.24,37.34 7.24,38.73 6.87,39.11 J10.2 4.19,39.11 3.81,39.49 U10.8 | 11.56,38.11 11.57,38.09 U12.DRAIN 11.57,34.94 10.16,33.53 v10.16,33.02 J12.4
  Bottom 0.203: JP7.2 12.7,33.78 11.94,33.02 v10.16,33.02
3.3V4  (via drill 0.3)
  Top 0.203: R32.2 49.62,43.01 49.4,42.8 42.55,42.8 | 42.55,42.8 42.55,38.11 | U14.8 42.55,46.86 | 42.55,46.86 43.31,46.86 43.69,46.48 R29.1 | 42.55,42.8 42.55,46.86
  Top 0.305: J14.2 42.55,38.11 37.47,38.11 | 37.47,38.11 36.88,38.11 35.42,36.65 33.84,36.65 33.15,37.34 33.15,38.73 32.77,39.11 J13.2 30.1,39.11 29.72,39.49 U13.8 | 37.47,38.11 37.48,38.09 U15.DRAIN 37.48,34.94 36.07,33.53 v36.07,33.02 J15.4
  Bottom 0.203: JP9.2 38.61,33.78 37.85,33.02 v36.07,33.02
3.3V5  (via drill 0.3)
  Top 0.203: R39.2 75.53,43.01 75.31,42.8 68.45,42.8 | 68.45,42.8 68.45,38.11 | U17.8 68.45,46.86 | 68.45,46.86 69.22,46.86 69.6,46.48 R36.1 | 68.45,42.8 68.45,46.86
  Top 0.305: J17.2 68.45,38.11 63.37,38.11 | 63.37,38.11 62.79,38.11 61.33,36.65 59.74,36.65 59.05,37.34 59.05,38.73 58.68,39.11 J16.2 56.01,39.11 55.63,39.49 U16.8 | 63.37,38.11 63.39,38.09 U18.DRAIN 63.39,34.94 61.98,33.53 v61.98,33.02 J18.4
  Bottom 0.203: JP11.2 64.52,33.78 63.75,33.02 v61.98,33.02
3.3V6  (via drill 0.3)
  Top 0.203: R46.2 23.71,68.92 23.5,68.71 16.64,68.71 | 16.64,68.71 16.64,64.02 | U20.8 16.64,72.77 | 16.64,72.77 17.4,72.77 17.78,72.39 R43.1 | 16.64,68.71 16.64,72.77
  Top 0.305: J20.2 16.64,64.02 11.56,64.02 | 11.56,64.02 10.97,64.02 9.52,62.56 7.93,62.56 7.24,63.25 7.24,64.64 6.87,65.02 J19.2 4.19,65.02 3.81,65.4 U19.8 | 11.56,64.02 11.57,64 U21.DRAIN 11.57,60.85 10.16,59.44 v10.16,58.93 J21.4
  Bottom 0.203: JP13.2 12.7,59.69 11.94,58.93 v10.16,58.93
3.3V7  (via drill 0.3)
  Top 0.203: R53.2 49.62,68.92 49.4,68.71 42.55,68.71 | 42.55,68.71 42.55,64.02 | U23.8 42.55,72.77 | 42.55,72.77 43.31,72.77 43.69,72.39 R50.1 | 42.55,68.71 42.55,72.77
  Top 0.305: J23.2 42.55,64.02 37.47,64.02 | 37.47,64.02 36.88,64.02 35.42,62.56 33.84,62.56 33.15,63.25 33.15,64.64 32.77,65.02 J22.2 30.1,65.02 29.72,65.4 U22.8 | 37.47,64.02 37.48,64 U24.DRAIN 37.48,60.85 36.07,59.44 v36.07,58.93 J24.4
  Bottom 0.203: JP15.2 38.61,59.69 37.85,58.93 v36.07,58.93
3.3V8  (via drill 0.3)
  Top 0.203: R60.2 75.53,68.92 75.31,68.71 68.45,68.71 | 68.45,68.71 68.45,64.02 | U26.8 68.45,72.77 | 68.45,72.77 69.22,72.77 69.6,72.39 R57.1 | 68.45,68.71 68.45,72.77
  Top 0.305: J26.2 68.45,64.02 63.37,64.02 | 63.37,64.02 62.79,64.02 61.33,62.56 59.74,62.56 59.05,63.25 59.05,64.64 58.68,65.02 J25.2 56.01,65.02 55.63,65.4 U25.8 | 63.37,64.02 63.39,64 U27.DRAIN 63.39,60.85 61.98,59.44 v61.98,58.93 J27.4
  Bottom 0.203: JP17.2 64.52,59.69 63.75,58.93 v61.98,58.93
!INT  (via drill 0.3)
  Top 0.203: U1.2 4.31,22.35 3.8,22.86 2.54,22.86 1.91,22.23 v1.91,17.02
  Bottom 0.203: v1.91,17.02 3.05,15.88 3.05,9.65 6.35,6.35 15.24,6.35 17.78,3.81 J2.1
!INT1  (via drill 0.3)
  Top 0.203: U4.2 30.22,22.35 29.71,22.86 28.45,22.86 27.81,22.23 v27.81,17.02
  Bottom 0.203: v27.81,17.02 28.96,15.88 28.96,9.65 32.26,6.35 41.15,6.35 43.69,3.81 J6.1
!INT2  (via drill 0.3)
  Top 0.203: U7.2 56.13,22.35 55.62,22.86 54.36,22.86 53.72,22.23 v53.72,17.02
  Bottom 0.203: v53.72,17.02 54.86,15.88 54.86,9.65 58.17,6.35 67.06,6.35 69.6,3.81 J9.1
!INT3  (via drill 0.3)
  Top 0.203: U10.2 4.31,48.26 3.8,48.77 2.54,48.77 1.91,48.13 v1.91,42.93
  Bottom 0.203: v1.91,42.93 3.05,41.78 3.05,35.56 6.35,32.26 15.24,32.26 17.78,29.72 J12.1
!INT4  (via drill 0.3)
  Top 0.203: U13.2 30.22,48.26 29.71,48.77 28.45,48.77 27.81,48.13 v27.81,42.93
  Bottom 0.203: v27.81,42.93 28.96,41.78 28.96,35.56 32.26,32.26 41.15,32.26 43.69,29.72 J15.1
!INT5  (via drill 0.3)
  Top 0.203: U16.2 56.13,48.26 55.62,48.77 54.36,48.77 53.72,48.13 v53.72,42.93
  Bottom 0.203: v53.72,42.93 54.86,41.78 54.86,35.56 58.17,32.26 67.06,32.26 69.6,29.72 J18.1
!INT6  (via drill 0.3)
  Top 0.203: U19.2 4.31,74.17 3.8,74.68 2.54,74.68 1.91,74.04 v1.91,68.83
  Bottom 0.203: v1.91,68.83 3.05,67.69 3.05,61.47 6.35,58.17 15.24,58.17 17.78,55.63 J21.1
!INT7  (via drill 0.3)
  Top 0.203: U22.2 30.22,74.17 29.71,74.68 28.45,74.68 27.81,74.04 v27.81,68.83
  Bottom 0.203: v27.81,68.83 28.96,67.69 28.96,61.47 32.26,58.17 41.15,58.17 43.69,55.63 J24.1
!INT8  (via drill 0.3)
  Top 0.203: U25.2 56.13,74.17 55.62,74.68 54.36,74.68 53.72,74.04 v53.72,68.83
  Bottom 0.203: v53.72,68.83 54.86,67.69 54.86,61.47 58.17,58.17 67.06,58.17 69.6,55.63 J27.1
GND  (via drill 0.3)  (22 unrouted)
  other vias: 15.88,11.18 15.75,14.22 9.91,16 4.95,22.48 3.05,22.23 6.48,14.22 8.89,14.86 19.05,10.54 20.45,19.68 7.62,7.62 17.53,14.22
  pour Top: 0,25.4 0,0 25.4,0 25.4,25.4
  pour Bottom: 0,0 0,25.4 25.4,25.4 25.4,0
GND1  (via drill 0.3)  (22 unrouted)
  other vias: 41.78,11.18 41.66,14.22 35.81,16 30.86,22.48 28.96,22.23 32.38,14.22 34.8,14.86 44.96,10.54 46.35,19.68 33.53,7.62 43.43,14.22
  pour Top: 25.91,25.4 25.91,0 51.31,0 51.31,25.4
  pour Bottom: 25.91,0 25.91,25.4 51.31,25.4 51.31,0
GND2  (via drill 0.3)  (22 unrouted)
  other vias: 67.69,11.18 67.56,14.22 61.72,16 56.77,22.48 54.86,22.23 58.29,14.22 60.71,14.86 70.87,10.54 72.26,19.68 59.44,7.62 69.34,14.22
  pour Top: 51.82,25.4 51.82,0 77.22,0 77.22,25.4
  pour Bottom: 51.82,0 51.82,25.4 77.22,25.4 77.22,0
GND3  (via drill 0.3)  (22 unrouted)
  other vias: 15.88,37.08 15.75,40.13 9.91,41.91 4.95,48.39 3.05,48.13 6.48,40.13 8.89,40.77 19.05,36.45 20.45,45.59 7.62,33.53 17.53,40.13
  pour Top: 0,51.31 0,25.91 25.4,25.91 25.4,51.31
  pour Bottom: 0,25.91 0,51.31 25.4,51.31 25.4,25.91
GND4  (via drill 0.3)  (22 unrouted)
  other vias: 41.78,37.08 41.66,40.13 35.81,41.91 30.86,48.39 28.96,48.13 32.38,40.13 34.8,40.77 44.96,36.45 46.35,45.59 33.53,33.53 43.43,40.13
  pour Top: 25.91,51.31 25.91,25.91 51.31,25.91 51.31,51.31
  pour Bottom: 25.91,25.91 25.91,51.31 51.31,51.31 51.31,25.91
GND5  (via drill 0.3)  (22 unrouted)
  other vias: 67.69,37.08 67.56,40.13 61.72,41.91 56.77,48.39 54.86,48.13 58.29,40.13 60.71,40.77 70.87,36.45 72.26,45.59 59.44,33.53 69.34,40.13
  pour Top: 51.82,51.31 51.82,25.91 77.22,25.91 77.22,51.31
  pour Bottom: 51.82,25.91 51.82,51.31 77.22,51.31 77.22,25.91
GND6  (via drill 0.3)  (22 unrouted)
  other vias: 15.88,62.99 15.75,66.04 9.91,67.82 4.95,74.3 3.05,74.04 6.48,66.04 8.89,66.67 19.05,62.36 20.45,71.5 7.62,59.44 17.53,66.04
  pour Top: 0,77.22 0,51.82 25.4,51.82 25.4,77.22
  pour Bottom: 0,51.82 0,77.22 25.4,77.22 25.4,51.82
GND7  (via drill 0.3)  (22 unrouted)
  other vias: 41.78,62.99 41.66,66.04 35.81,67.82 30.86,74.3 28.96,74.04 32.38,66.04 34.8,66.67 44.96,62.36 46.35,71.5 33.53,59.44 43.43,66.04
  pour Top: 25.91,77.22 25.91,51.82 51.31,51.82 51.31,77.22
  pour Bottom: 25.91,51.82 25.91,77.22 51.31,77.22 51.31,51.82
GND8  (via drill 0.3)  (22 unrouted)
  other vias: 67.69,62.99 67.56,66.04 61.72,67.82 56.77,74.3 54.86,74.04 58.29,66.04 60.71,66.67 70.87,62.36 72.26,71.5 59.44,59.44 69.34,66.04
  pour Top: 51.82,77.22 51.82,51.82 77.22,51.82 77.22,77.22
  pour Bottom: 51.82,51.82 51.82,77.22 77.22,77.22 77.22,51.82
N$1
  Top 0.203: U2.2 9.14,19.68 8.76,19.3 8.76,18.67 8.29,18.2 R5.2 R4.1
N$2
  Top 0.305: R2.2 C2.1
N$3  (via drill 0.3)
  Top 0.203: R1.1 v20.7,17.78
  Bottom 0.203: JP2.1 21.21,17.27 v20.7,17.78
N$4  (via drill 0.3)
  Top 0.203: R7.1 9.31,8.04 v10.16,8.89
  Bottom 0.203: v10.16,8.89 JP1.3
N$5  (via drill 0.3)
  Top 0.203: R6.1 15.53,8.89 v15.24,8.89
  Bottom 0.203: v15.24,8.89 JP1.1
N$6  (via drill 0.3)
  Top 0.203: D1.A 24.26,19.05 24.77,18.54 v24.77,18.29
  Bottom 0.203: JP2.2 v24.77,18.29
N$7
  Top 0.305: R8.2 C1.1
N$8
  Top 0.203: U5.2 35.05,19.68 34.67,19.3 34.67,18.67 34.2,18.2 R10.2 R14.1
N$9  (via drill 0.3)
  Top 0.203: R13.1 35.22,8.04 v36.07,8.89
  Bottom 0.203: v36.07,8.89 JP3.3
N$10  (via drill 0.3)
  Top 0.203: R12.1 41.44,8.89 v41.15,8.89
  Bottom 0.203: v41.15,8.89 JP3.1
N$11  (via drill 0.3)
  Top 0.203: D2.A 50.16,19.05 50.67,18.54 v50.67,18.29
  Bottom 0.203: JP4.2 v50.67,18.29
N$12  (via drill 0.3)
  Top 0.203: R11.1 v46.61,17.78
  Bottom 0.203: JP4.1 47.12,17.27 v46.61,17.78
N$13
  Top 0.305: R15.2 C3.1
N$14
  Top 0.203: U8.2 60.96,19.68 60.58,19.3 60.58,18.67 60.11,18.2 R17.2 R21.1
N$15  (via drill 0.3)
  Top 0.203: R20.1 61.13,8.04 v61.98,8.89
  Bottom 0.203: v61.98,8.89 JP5.3
N$16  (via drill 0.3)
  Top 0.203: R19.1 67.35,8.89 v67.06,8.89
  Bottom 0.203: v67.06,8.89 JP5.1
N$17  (via drill 0.3)
  Top 0.203: D3.A 76.07,19.05 76.58,18.54 v76.58,18.29
  Bottom 0.203: JP6.2 v76.58,18.29
N$18  (via drill 0.3)
  Top 0.203: R18.1 v72.52,17.78
  Bottom 0.203: JP6.1 73.03,17.27 v72.52,17.78
N$19
  Top 0.305: R22.2 C4.1
N$20
  Top 0.203: U11.2 9.14,45.59 8.76,45.21 8.76,44.58 8.29,44.11 R24.2 R28.1
N$21  (via drill 0.3)
  Top 0.203: R27.1 9.31,33.95 v10.16,34.8
  Bottom 0.203: v10.16,34.8 JP7.3
N$22  (via drill 0.3)
  Top 0.203: R26.1 15.53,34.8 v15.24,34.8
  Bottom 0.203: v15.24,34.8 JP7.1
N$23  (via drill 0.3)
  Top 0.203: D4.A 24.26,44.96 24.77,44.45 v24.77,44.2
  Bottom 0.203: JP8.2 v24.77,44.2
N$24  (via drill 0.3)
  Top 0.203: R25.1 v20.7,43.69
  Bottom 0.203: JP8.1 21.21,43.18 v20.7,43.69
N$25
  Top 0.305: R29.2 C5.1
N$26
  Top 0.203: U14.2 35.05,45.59 34.67,45.21 34.67,44.58 34.2,44.11 R31.2 R35.1
N$27  (via drill 0.3)
  Top 0.203: R34.1 35.22,33.95 v36.07,34.8
  Bottom 0.203: v36.07,34.8 JP9.3
N$28  (via drill 0.3)
  Top 0.203: R33.1 41.44,34.8 v41.15,34.8
  Bottom 0.203: v41.15,34.8 JP9.1
N$29  (via drill 0.3)
  Top 0.203: D5.A 50.16,44.96 50.67,44.45 v50.67,44.2
  Bottom 0.203: JP10.2 v50.67,44.2
N$30  (via drill 0.3)
  Top 0.203: R32.1 v46.61,43.69
  Bottom 0.203: JP10.1 47.12,43.18 v46.61,43.69
N$31
  Top 0.305: R36.2 C6.1
N$32
  Top 0.203: U17.2 60.96,45.59 60.58,45.21 60.58,44.58 60.11,44.11 R38.2 R42.1
N$33  (via drill 0.3)
  Top 0.203: R41.1 61.13,33.95 v61.98,34.8
  Bottom 0.203: v61.98,34.8 JP11.3
N$34  (via drill 0.3)
  Top 0.203: R40.1 67.35,34.8 v67.06,34.8
  Bottom 0.203: v67.06,34.8 JP11.1
N$35  (via drill 0.3)
  Top 0.203: D6.A 76.07,44.96 76.58,44.45 v76.58,44.2
  Bottom 0.203: JP12.2 v76.58,44.2
N$36  (via drill 0.3)
  Top 0.203: R39.1 v72.52,43.69
  Bottom 0.203: JP12.1 73.03,43.18 v72.52,43.69
N$37
  Top 0.305: R43.2 C7.1
N$38
  Top 0.203: U20.2 9.14,71.5 8.76,71.12 8.76,70.48 8.29,70.02 R45.2 R49.1
N$39  (via drill 0.3)
  Top 0.203: R48.1 9.31,59.86 v10.16,60.71
  Bottom 0.203: v10.16,60.71 JP13.3
N$40  (via drill 0.3)
  Top 0.203: R47.1 15.53,60.71 v15.24,60.71
  Bottom 0.203: v15.24,60.71 JP13.1
N$41  (via drill 0.3)
  Top 0.203: D7.A 24.26,70.87 24.77,70.36 v24.77,70.1
  Bottom 0.203: JP14.2 v24.77,70.1
N$42  (via drill 0.3)
  Top 0.203: R46.1 v20.7,69.6
  Bottom 0.203: JP14.1 21.21,69.09 v20.7,69.6
N$43
  Top 0.305: R50.2 C8.1
N$44
  Top 0.203: U23.2 35.05,71.5 34.67,71.12 34.67,70.48 34.2,70.02 R52.2 R56.1
N$45  (via drill 0.3)
  Top 0.203: R55.1 35.22,59.86 v36.07,60.71
  Bottom 0.203: v36.07,60.71 JP15.3
N$46  (via drill 0.3)
  Top 0.203: R54.1 41.44,60.71 v41.15,60.71
  Bottom 0.203: v41.15,60.71 JP15.1
N$47  (via drill 0.3)
  Top 0.203: D8.A 50.16,70.87 50.67,70.36 v50.67,70.1
  Bottom 0.203: JP16.2 v50.67,70.1
N$48  (via drill 0.3)
  Top 0.203: R53.1 v46.61,69.6
  Bottom 0.203: JP16.1 47.12,69.09 v46.61,69.6
N$49
  Top 0.305: R57.2 C9.1
N$50
  Top 0.203: U26.2 60.96,71.5 60.58,71.12 60.58,70.48 60.11,70.02 R59.2 R63.1
N$51  (via drill 0.3)
  Top 0.203: R62.1 61.13,59.86 v61.98,60.71
  Bottom 0.203: v61.98,60.71 JP17.3
N$52  (via drill 0.3)
  Top 0.203: R61.1 67.35,60.71 v67.06,60.71
  Bottom 0.203: v67.06,60.71 JP17.1
N$53  (via drill 0.3)
  Top 0.203: D9.A 76.07,70.87 76.58,70.36 v76.58,70.1
  Bottom 0.203: JP18.2 v76.58,70.1
N$54  (via drill 0.3)
  Top 0.203: R60.1 v72.52,69.6
  Bottom 0.203: JP18.1 73.03,69.09 v72.52,69.6
SCL  (via drill 0.3)
  Top 0.203: J4.4 6.33,11.2 v7.11,10.41 7.79,9.74 R7.2 | U1.10 4.81,16.14 5.46,15.49 v6.99,15.49 | v18.8,14.1 18.9,14.2 J5.4 21.49,14.2 22.33,13.36 22.33,10.01 21.51,9.19 19.86,9.19 15.24,4.57 J2.2
  Bottom 0.203: v6.99,15.49 7.11,15.37 v7.11,10.41 17.65,10.41 18.8,11.56 v18.8,14.1
SCL1  (via drill 0.3)
  Top 0.203: J1.4 32.23,11.2 v33.02,10.41 33.69,9.74 R13.2 | U4.10 30.72,16.14 31.37,15.49 v32.89,15.49 | v44.7,14.1 44.81,14.2 J3.4 47.4,14.2 48.23,13.36 48.23,10.01 47.42,9.19 45.77,9.19 41.15,4.57 J6.2
  Bottom 0.203: v32.89,15.49 33.02,15.37 v33.02,10.41 43.56,10.41 44.7,11.56 v44.7,14.1
SCL2  (via drill 0.3)
  Top 0.203: J7.4 58.14,11.2 v58.93,10.41 59.6,9.74 R20.2 | U7.10 56.63,16.14 57.28,15.49 v58.8,15.49 | v70.61,14.1 70.72,14.2 J8.4 73.3,14.2 74.14,13.36 74.14,10.01 73.32,9.19 71.68,9.19 67.06,4.57 J9.2
  Bottom 0.203: v58.8,15.49 58.93,15.37 v58.93,10.41 69.47,10.41 70.61,11.56 v70.61,14.1
SCL3  (via drill 0.3)
  Top 0.203: J10.4 6.33,37.11 v7.11,36.32 7.79,35.65 R27.2 | U10.10 4.81,42.05 5.46,41.4 v6.99,41.4 | v18.8,40.01 18.9,40.11 J11.4 21.49,40.11 22.33,39.27 22.33,35.92 21.51,35.1 19.86,35.1 15.24,30.48 J12.2
  Bottom 0.203: v6.99,41.4 7.11,41.27 v7.11,36.32 17.65,36.32 18.8,37.47 v18.8,40.01
SCL4  (via drill 0.3)
  Top 0.203: J13.4 32.23,37.11 v33.02,36.32 33.69,35.65 R34.2 | U13.10 30.72,42.05 31.37,41.4 v32.89,41.4 | v44.7,40.01 44.81,40.11 J14.4 47.4,40.11 48.23,39.27 48.23,35.92 47.42,35.1 45.77,35.1 41.15,30.48 J15.2
  Bottom 0.203: v32.89,41.4 33.02,41.27 v33.02,36.32 43.56,36.32 44.7,37.47 v44.7,40.01
SCL5  (via drill 0.3)
  Top 0.203: J16.4 58.14,37.11 v58.93,36.32 59.6,35.65 R41.2 | U16.10 56.63,42.05 57.28,41.4 v58.8,41.4 | v70.61,40.01 70.72,40.11 J17.4 73.3,40.11 74.14,39.27 74.14,35.92 73.32,35.1 71.68,35.1 67.06,30.48 J18.2
  Bottom 0.203: v58.8,41.4 58.93,41.27 v58.93,36.32 69.47,36.32 70.61,37.47 v70.61,40.01
SCL6  (via drill 0.3)
  Top 0.203: J19.4 6.33,63.02 v7.11,62.23 7.79,61.56 R48.2 | U19.10 4.81,67.96 5.46,67.31 v6.99,67.31 | v18.8,65.91 18.9,66.02 J20.4 21.49,66.02 22.33,65.18 22.33,61.83 21.51,61.01 19.86,61.01 15.24,56.39 J21.2
  Bottom 0.203: v6.99,67.31 7.11,67.18 v7.11,62.23 17.65,62.23 18.8,63.37 v18.8,65.91
SCL7  (via drill 0.3)
  Top 0.203: J22.4 32.23,63.02 v33.02,62.23 33.69,61.56 R55.2 | U22.10 30.72,67.96 31.37,67.31 v32.89,67.31 | v44.7,65.91 44.81,66.02 J23.4 47.4,66.02 48.23,65.18 48.23,61.83 47.42,61.01 45.77,61.01 41.15,56.39 J24.2
  Bottom 0.203: v32.89,67.31 33.02,67.18 v33.02,62.23 43.56,62.23 44.7,63.37 v44.7,65.91
SCL8  (via drill 0.3)
  Top 0.203: J25.4 58.14,63.02 v58.93,62.23 59.6,61.56 R62.2 | U25.10 56.63,67.96 57.28,67.31 v58.8,67.31 | v70.61,65.91 70.72,66.02 J26.4 73.3,66.02 74.14,65.18 74.14,61.83 73.32,61.01 71.68,61.01 67.06,56.39 J27.2
  Bottom 0.203: v58.8,67.31 58.93,67.18 v58.93,62.23 69.47,62.23 70.61,63.37 v70.61,65.91
SDA  (via drill 0.3)
  Top 0.203: J5.3 21.47,13.2 21.97,12.7 21.97,10.16 21.36,9.55 v19.05,9.55 R6.2 13.87,9.55 12.7,8.38 J2.3 | v4.42,15.24 4.31,15.35 U1.9 | v3.81,12.19 v3.82,12.2 J4.3
  Bottom 0.203: v4.42,15.24 4.42,12.8 v3.81,12.19 3.81,10.92 4.95,9.78 18.84,9.78 19.05,9.57 v19.05,9.55
SDA1  (via drill 0.3)
  Top 0.203: J3.3 47.38,13.2 47.88,12.7 47.88,10.16 47.27,9.55 v44.96,9.55 R12.2 39.78,9.55 38.61,8.38 J6.3 | v30.33,15.24 30.22,15.35 U4.9 | v29.72,12.19 v29.73,12.2 J1.3
  Bottom 0.203: v30.33,15.24 30.33,12.8 v29.72,12.19 29.72,10.92 30.86,9.78 44.75,9.78 44.96,9.57 v44.96,9.55
SDA2  (via drill 0.3)
  Top 0.203: J8.3 73.29,13.2 73.79,12.7 73.79,10.16 73.18,9.55 v70.87,9.55 R19.2 65.68,9.55 64.52,8.38 J9.3 | v56.24,15.24 56.13,15.35 U7.9 | v55.63,12.19 v55.63,12.2 J7.3
  Bottom 0.203: v56.24,15.24 56.24,12.8 v55.63,12.19 55.63,10.92 56.77,9.78 70.65,9.78 70.87,9.57 v70.87,9.55
SDA3  (via drill 0.3)
  Top 0.203: J11.3 21.47,39.11 21.97,38.61 21.97,36.07 21.36,35.46 v19.05,35.46 R26.2 13.87,35.46 12.7,34.29 J12.3 | v4.42,41.15 4.31,41.26 U10.9 | v3.81,38.1 v3.82,38.11 J10.3
  Bottom 0.203: v4.42,41.15 4.42,38.71 v3.81,38.1 3.81,36.83 4.95,35.69 18.84,35.69 19.05,35.48 v19.05,35.46
SDA4  (via drill 0.3)
  Top 0.203: J14.3 47.38,39.11 47.88,38.61 47.88,36.07 47.27,35.46 v44.96,35.46 R33.2 39.78,35.46 38.61,34.29 J15.3 | v30.33,41.15 30.22,41.26 U13.9 | v29.72,38.1 v29.73,38.11 J13.3
  Bottom 0.203: v30.33,41.15 30.33,38.71 v29.72,38.1 29.72,36.83 30.86,35.69 44.75,35.69 44.96,35.48 v44.96,35.46
SDA5  (via drill 0.3)
  Top 0.203: J17.3 73.29,39.11 73.79,38.61 73.79,36.07 73.18,35.46 v70.87,35.46 R40.2 65.68,35.46 64.52,34.29 J18.3 | v56.24,41.15 56.13,41.26 U16.9 | v55.63,38.1 v55.63,38.11 J16.3
  Bottom 0.203: v56.24,41.15 56.24,38.71 v55.63,38.1 55.63,36.83 56.77,35.69 70.65,35.69 70.87,35.48 v70.87,35.46
SDA6  (via drill 0.3)
  Top 0.203: J20.3 21.47,65.02 21.97,64.52 21.97,61.98 21.36,61.37 v19.05,61.37 R47.2 13.87,61.37 12.7,60.2 J21.3 | v4.42,67.06 4.31,67.17 U19.9 | v3.81,64.01 v3.82,64.02 J19.3
  Bottom 0.203: v4.42,67.06 4.42,64.62 v3.81,64.01 3.81,62.74 4.95,61.59 18.84,61.59 19.05,61.38 v19.05,61.37
SDA7  (via drill 0.3)
  Top 0.203: J23.3 47.38,65.02 47.88,64.52 47.88,61.98 47.27,61.37 v44.96,61.37 R54.2 39.78,61.37 38.61,60.2 J24.3 | v30.33,67.06 30.22,67.17 U22.9 | v29.72,64.01 v29.73,64.02 J22.3
  Bottom 0.203: v30.33,67.06 30.33,64.62 v29.72,64.01 29.72,62.74 30.86,61.59 44.75,61.59 44.96,61.38 v44.96,61.37
SDA8  (via drill 0.3)
  Top 0.203: J26.3 73.29,65.02 73.79,64.52 73.79,61.98 73.18,61.37 v70.87,61.37 R61.2 65.68,61.37 64.52,60.2 J27.3 | v56.24,67.06 56.13,67.17 U25.9 | v55.63,64.01 v55.63,64.02 J25.3
  Bottom 0.203: v56.24,67.06 56.24,64.62 v55.63,64.01 55.63,62.74 56.77,61.59 70.65,61.59 70.87,61.38 v70.87,61.37
SIGNAL
  Top 0.203: U2.1 6.48,20.95 6.35,20.83 R4.2 3.73,19.9 3.31,20.32 U1.4
SIGNAL1
  Top 0.203: U5.1 32.38,20.95 32.26,20.83 R14.2 29.64,19.9 29.22,20.32 U4.4
SIGNAL2
  Top 0.203: U8.1 58.29,20.95 58.17,20.83 R21.2 55.55,19.9 55.13,20.32 U7.4
SIGNAL3
  Top 0.203: U11.1 6.48,46.86 6.35,46.74 R28.2 3.73,45.81 3.31,46.23 U10.4
SIGNAL4
  Top 0.203: U14.1 32.38,46.86 32.26,46.74 R35.2 29.64,45.81 29.22,46.23 U13.4
SIGNAL5
  Top 0.203: U17.1 58.29,46.86 58.17,46.74 R42.2 55.55,45.81 55.13,46.23 U16.4
SIGNAL6
  Top 0.203: U20.1 6.48,72.77 6.35,72.64 R49.2 3.73,71.72 3.31,72.14 U19.4
SIGNAL7
  Top 0.203: U23.1 32.38,72.77 32.26,72.64 R56.2 29.64,71.72 29.22,72.14 U22.4
SIGNAL8
  Top 0.203: U26.1 58.29,72.77 58.17,72.64 R63.2 55.55,71.72 55.13,72.14 U25.4
SOURCE
  Top 0.203: U2.3 11.18,18.41 11.57,18.02 U3.SOURCE 11.57,13.38 10.05,11.85 R3.1
SOURCE1
  Top 0.203: U5.3 37.08,18.41 37.48,18.02 U6.SOURCE 37.48,13.38 35.96,11.85 R9.1
SOURCE2
  Top 0.203: U8.3 62.99,18.41 63.39,18.02 U9.SOURCE 63.39,13.38 61.87,11.85 R16.1
SOURCE3
  Top 0.203: U11.3 11.18,44.32 11.57,43.92 U12.SOURCE 11.57,39.28 10.05,37.76 R23.1
SOURCE4
  Top 0.203: U14.3 37.08,44.32 37.48,43.92 U15.SOURCE 37.48,39.28 35.96,37.76 R30.1
SOURCE5
  Top 0.203: U17.3 62.99,44.32 63.39,43.92 U18.SOURCE 63.39,39.28 61.87,37.76 R37.1
SOURCE6
  Top 0.203: U20.3 11.18,70.23 11.57,69.83 U21.SOURCE 11.57,65.19 10.05,63.67 R44.1
SOURCE7
  Top 0.203: U23.3 37.08,70.23 37.48,69.83 U24.SOURCE 37.48,65.19 35.96,63.67 R51.1
SOURCE8
  Top 0.203: U26.3 62.99,70.23 63.39,69.83 U27.SOURCE 63.39,65.19 61.87,63.67 R58.1

## Text on the board
Bottom: x15 | JM | x15 | JM | x15 | JM | x15 | JM | x15 | JM | x15 | JM | x15 | JM | x15 | JM | x15 | JM
tDocu: Max reflow temp is 240C | Max reflow temp is 240C | Max reflow temp is 240C | No clean | No clean | No clean | Max reflow temp is 240C | Max reflow temp is 240C | Max reflow temp is 240C | No clean | No clean | No clean | Max reflow temp is 240C | Max reflow temp is 240C | Max reflow temp is 240C | No clean | No clean | No clean